# Altium PCB POT.PcbDoc
Units mm, origin at the board's own origin, x right, y up, seen from the top; angles counter-clockwise.
Board outline 31.95 x 23.94 mm, 2 copper layers (Top Layer, Bottom Layer); 8 components, 4 nets, 14 pads, 48 vias.
Unrouted connection lines stored in the file: 6.
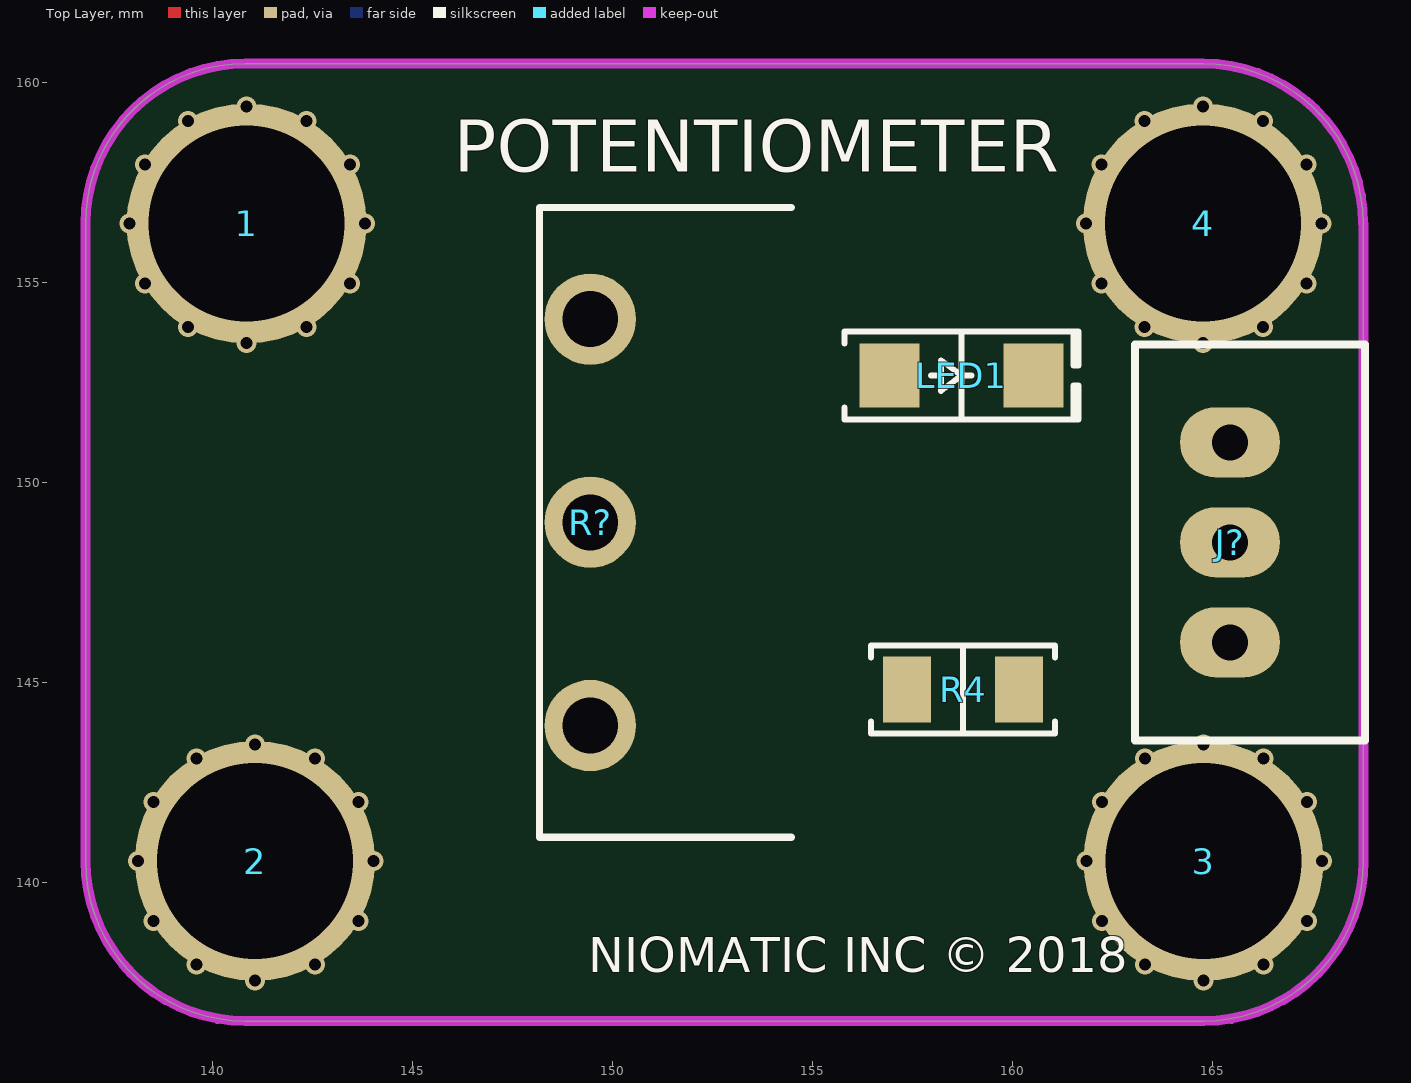
[diagram p0: Top Layer view]
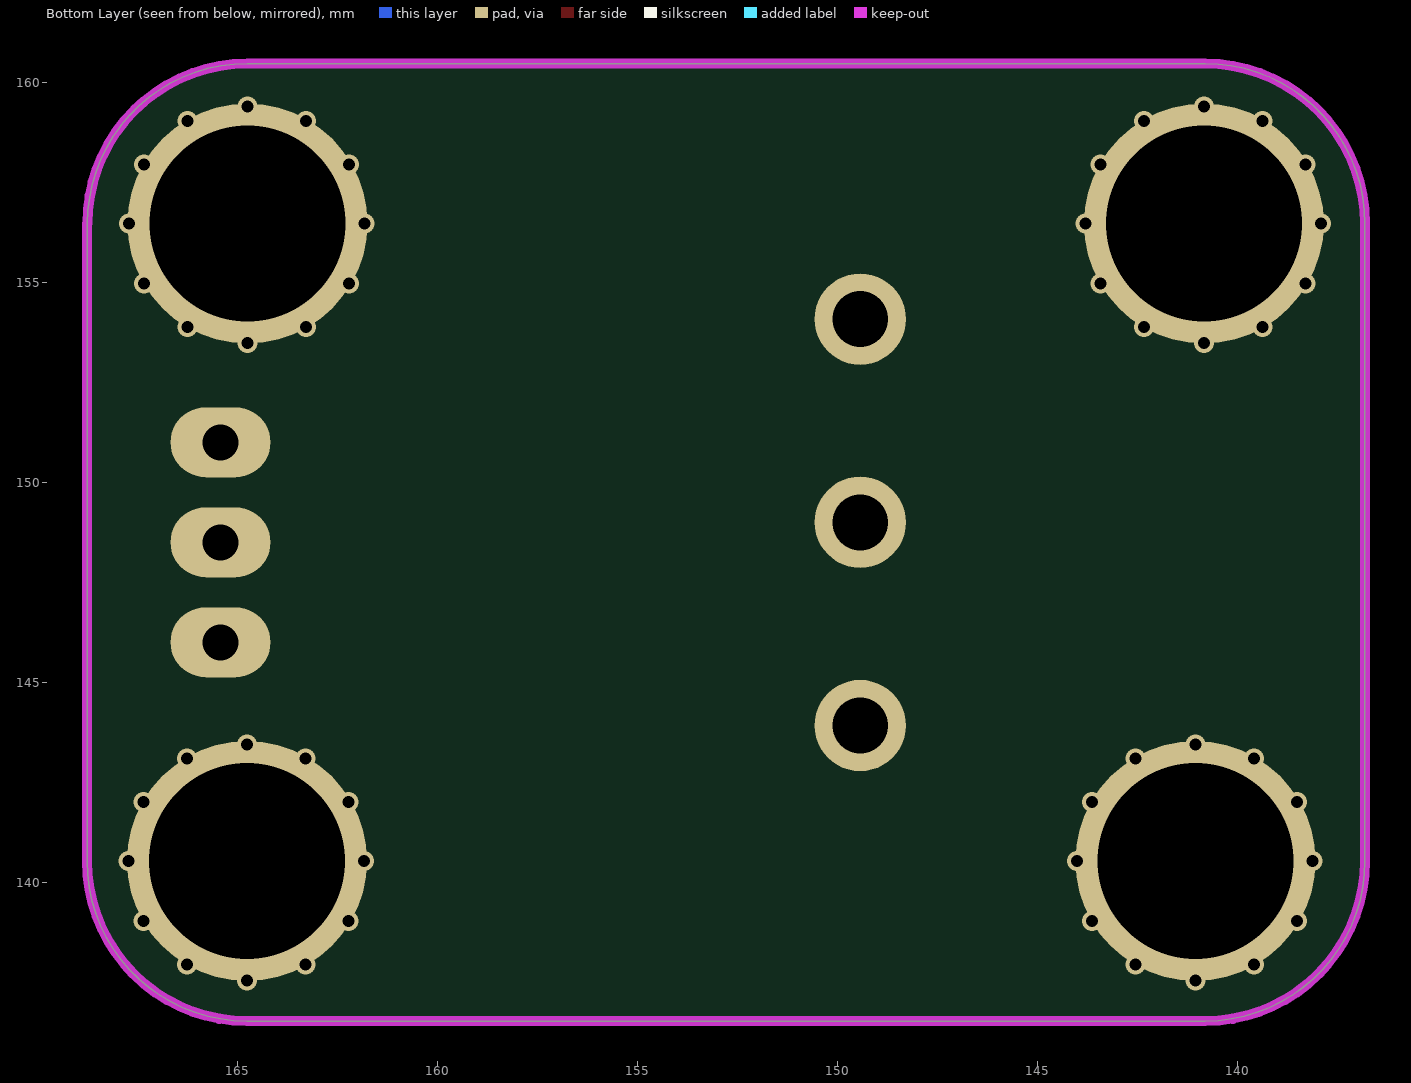
[diagram p1: Bottom Layer view, seen from below]

## Layer stack, top to bottom
Top Solder: solder mask 0.0102, Solder Resist, Dk 3.5
Top Layer: signal copper 0.0356
Dielectric 1: dielectric 0.32, FR-4, Dk 4.8
Bottom Layer: signal copper 0.0356
Bottom Solder: solder mask 0.0102, Solder Resist, Dk 3.5

## Board outline
136.821,140.53 ccw(c140.821,140.53) 140.821,136.53 164.77,136.53 ccw(c164.77,140.53) 168.77,140.53 168.77,156.47 168.761,156.47 ccw(c164.761,156.47) 164.761,160.47 140.821,160.47 ccw(c140.821,156.47) 136.821,156.47 136.821,156.45

## Design rules (kind name [scope] priority, off if disabled: settings)
Clearance [All] p1: gap=0.254 ignorepadtopadclearanceinfootprint=FALSE except(0: Arc-Hole Track-Hole SMDPad-Hole THPad-Hole Via-Hole Fill-Hole Poly-Hole Region-Hole Text-Hole)
PolygonConnect [All] p1: connectstyle=Relief reliefconductorwidth=0.254 reliefentries=4 polygonreliefangle="90 Angle" airgapwidth=0.254
RoomDefinition POT [InComponentClass('POT')] p1: confinementstyle=ConfineIn formatcopy=TRUE lockcomponents=FALSE outline 178.943,26.924 198.247,26.924 198.247,44.577 178.943,44.577
RoutingVias [All] p1: holewidth=0.2 width=0.5 viastyle="Through Hole" minholewidth=0.2 minwidth=0.5 maxholewidth=0.2 maxwidth=0.5
SolderMaskExpansion [All] p1: expansion=0.102
Width [All] p1: maxlimit=0.2 minlimit=0.2 preferedwidth=0.2
30 further rules are at their usual default settings.

## Components (designator, comment, footprint, x,y, rotation, side; value= is the part's Value field where it differs from the comment)
1 "Lego" "Lego Hole" 140.85,156.47 r90 top
2 "Lego" "Lego Hole" 141.06,140.53 r90 top
3 "Lego" "Lego Hole" 164.771,140.53 r90 top
4 "Lego" "Lego Hole" 164.761,156.47 r90 top
J? "Header" "JST XH B3B-XH-A - RIGHT" 165.433,148.5 r90 top
LED1 "RED" "LED 1206/3216 RED" 158.72,152.67 r0 top value=Green
R4 "1K" "RES 1206/3216" 158.76,144.82 r0 top
R? "10k" "Setpoint POT" 162.14,149 r270 top

## Footprints (in the part's own frame and the unit in brackets; to place one, negate y for a bottom-side part, rotate by r counter-clockwise, add the part's x,y. Pads: shape width x height; smd on the part's side, far side on the other; paste and mask are expansions set on the pad)
"JST XH B3B-XH-A - RIGHT" [mm]
  oval 1.75x2.5 hole 0.9: 1(-2.5,0) 2(0,0) 3(2.5,0)
  silkscreen extent -4.95,-3.38 4.95,2.38, body extent -4.9,-9.15 5,2.35, height 6.1
"LED 1206/3216 RED" [mm] "Chip Diode, 2-Leads, Body 3.13x1.55mm, IPC Medium Density"
  rect 1.5x1.6 smd: 1(-1.8,0) 2(1.8,0)
  silkscreen extent -2.92,-1.1 2.92,1.1, body extent -1.6,-0.8 1.6,0.8, height 0.9
"Lego Hole" [mm]
  round 6 hole 4.9: 0(0,0)
"RES 1206/3216" [mm] "Chip Resistor, 2-Leads, Body 3.13x1.55mm, IPC Medium Density"
  rect 1.2x1.65 smd: 1(-1.4,0) 2(1.4,0)
  silkscreen extent -2.3,-1.1 2.3,1.1, body extent -1.57,-0.8 1.62,0.8, height 0.6
"Setpoint POT" [mil]
  round 90 hole 55: 1(-200,-500) 2(200,-500) 3(0,-500)
  silkscreen extent -310,-550 310,-302, body extent -310,-1413 310,-302, height 810

## Part data
J?: library part "3 Pin"
LED1: library part LED, "Chip LED"
R4: library part Resistor, "SMT Resistor"
R?: library part Potentiometer, "Potentiometer"

## Via types
v1: diameter 0.5, hole 0.3, Top Layer to Bottom Layer, 48 vias

## Nets (pads, with @x,y where several pads share a name; then routed paths per layer and width w, separated by ;. In a path a pad name is that pad's centre, name@x,y a point inside that pad or via, vN(x,y) a via of type N, cw(c..) or ccw(c..) an arc to the next point about the centre after c; other vN are vias at no path point)
AOUT: J?.3 R?.2
GND: J?.1 LED1.2 R?.3
NetLED1_1: LED1.1 R4.1
VCC: J?.2 R4.2 R?.1
pads on no net: 1.0 2.0 3.0 4.0
copper on no net:
  other v1: 141.06,137.541 164.771,137.541 139.594,137.941 142.555,137.941 163.305,137.941 166.266,137.941 138.522,139.036 143.649,139.036 162.233,139.036 167.36,139.036 138.13,140.53 144.02,140.53 161.841,140.53 167.731,140.53 138.522,142.011 143.649,142.011 162.233,142.011 167.36,142.011 139.594,143.094 142.555,143.094 163.305,143.094 166.266,143.094 141.06,143.451 164.771,143.451 140.85,153.481 164.761,153.481 139.384,153.881 142.345,153.881 163.295,153.881 166.256,153.881 138.312,154.976 143.439,154.976 162.223,154.976 167.35,154.976 137.92,156.47 143.81,156.47 161.831,156.47 167.721,156.47 138.312,157.951 143.439,157.951 162.223,157.951 167.35,157.951 139.384,159.034 142.345,159.034 163.295,159.034 166.256,159.034 140.85,159.391 164.761,159.391

## Keep-outs
Keep-Out Layer:
  lines w0.254: 136.821,140.51 136.821,156.45 ; 136.821,140.53 ccw(c140.821,140.53) 140.821,136.53 164.77,136.53 ccw(c164.77,140.53) 168.77,140.53 168.77,156.47 ; 136.821,156.47 cw(c140.821,156.47) 140.821,160.47 164.761,160.47 cw(c164.761,156.47) 168.761,156.47

## Silkscreen, mask and mechanical layers (free items; w line width, h text height)
Top Overlay:
  text "POTENTIOMETER" at 146.03,157.77 h1.3
  text "NIOMATIC INC © 2018" at 149.39,137.46 h1.5
Top Solder:
  drawing of 381 lines, arcs and shapes, not listed
  text "NIOT Kit" at 149.39,138.5 h1.52